# EAGLE board FM Radio Receiver 1.5V (EAGLE 7.2.0)

No outline drawn. Coordinates in mm, seen from the top.
Copper layers (1*16): Top 0.035mm / dielectric 1.5mm / Bottom 0.035mm
Design rules "default": minimum track width 10mil, minimum drill 24mil, track to track 8mil, track to pad 8mil, pad to pad 8mil, via to via 8mil, smd to smd 8mil, copper to edge 40mil, drill to drill 8mil, minimum pad ring 10mil, minimum via ring 8mil, stop-mask expansion 4mil, vias tented up to drill 0mil, thermal gap 10mil

## Footprints (pad centres in the part's own frame; a part is rotated, then mirrored left to right if it is on the bottom)
C050-020X044 = drill 0.9 pad 1.778: 1 -2.54,0; 2 2.54,0
C050-025X060 = drill 0.9 pad 1.778: 1 0,2.54; 2 0,-2.54
E2.5-4/V = drill 0.9 square: + 0,1.27 | drill 0.9 pad 1.778: - 0,-1.27
C050-020X036 = drill 0.9 pad 1.778: 1 -2.54,0; 2 2.54,0
C075-020X044 = drill 0.9 pad 1.778: 1 -2.54,0; 2 5.08,0
TRIM-2222-808 = drill 1.1 octagon: 1 -2.54,2.54; 2 -2.54,-2.54; 3 2.54,-2.54
CTRIMTZ03 = drill 0.9 pad 1.778: 1 0,2.5; 2 0,-2.5
L-03/10 = drill 0.9 pad 1.778: 1 5.08,0; 2 -5.08,0
L-04/8V = drill 0.9 pad 1.778: 1 1.27,-5.08; 2 -1.27,2.54
0204/10-V = drill 0.9 pad 1.778: 1 0,5.08; 2 0,-5.08
0204/7 = drill 0.9 pad 1.778: 1 -2.54,0; 2 5.08,0
POT = drill 0.9 pad 1.778: A -2.54,0; E 2.54,0; S 0,0
TO92-CBE-A = drill 0.9 pad 1.778: 1 0,2.54; 2 2.54,0; 3 0,-2.54

## Placement (x,y rotation side)
C1  [C050-020X044]  76.2,25.4 270 top
C2  [C050-020X044]  88.9,25.4 270 top
C3  10nF  [C050-025X060]  101.6,22.86 0 top
C4  10nF  [C050-020X044]  63.5,25.4 270 top
C5  100μF  [E2.5-4/V]  106.68,27.94 0 top
C6  22pF  [C050-020X036]  10.16,22.86 0 top
C7  100nF  [C075-020X044]  22.86,20.32 90 top
C8  20pF  [TRIM-2222-808]  0,30.48 180 top
C9  5pF  [CTRIMTZ03]  7.62,30.48 180 top
L1  2.2μH  [L-03/10]  55.88,27.94 0 top
L2  [L-04/8V]  15.24,33.02 0 top
R1  4.7kΩ  [0204/10-V]  68.58,33.02 0 top
R2  4.7kΩ  [0204/10-V]  81.28,33.02 0 top
R3  [0204/10-V]  93.98,33.02 0 top
R4  1MΩ  [0204/7]  66.04,25.4 90 top
R5  1MΩ  [0204/7]  78.74,25.4 90 top
R6  56kΩ  [0204/7]  91.44,27.94 270 top
R7  10kΩ  [0204/10-V]  48.26,33.02 0 top
R8  470kΩ  [0204/10-V]  25.4,30.48 0 top
R9  10kΩ  [POT]  25.4,38.1 180 top
T1  [TO92-CBE-A]  68.58,22.86 0 top
T2  [TO92-CBE-A]  81.28,22.86 0 top
T3  [TO92-CBE-A]  93.98,22.86 0 top
T4  [TO92-CBE-A]  30.48,25.4 0 top

## Library data of the parts
C1-C7 = c
C8 C9 = cap-trim
L1 L2 = l
R1-R9 = r
T1-T4 = t

## Nets
N$1: C1.2 R5.1 T2.2
N$2: C2.1 R2.2 R5.2 T2.1
N$3: C1.1 R1.2 R4.2 T1.1
N$4: C2.2 R6.1 T3.2
N$5: C3.1 R3.2 R6.2 T3.1
N$7: C4.2 R4.1 T1.2
N$8: C4.1 L1.1
N$10: C5.+ R1.1 R2.1 R3.1 R7.1 R9.A
N$11: C7.2 R8.2 T4.2
N$12: R8.1 R9.S
N$13: C8.2 C9.2 L2.2 T4.1
N$14: C6.2 C7.1 L1.2 L2.1 R7.2
N$15: C6.1 C8.1 C9.1
N$16: C3.2 C5.- R9.E T1.3 T2.3 T3.3 T4.3

## Tracks (layer width: path | path; a pad name or v marks a point on that pad's centre or on a via)
N$1  (2 unrouted)
N$2  (3 unrouted)
N$3  (3 unrouted)
N$4  (2 unrouted)
N$5  (3 unrouted)
N$7  (2 unrouted)
N$8  (1 unrouted)
N$10  (5 unrouted)
N$11  (2 unrouted)
N$12  (1 unrouted)
N$13  (3 unrouted)
N$14  (4 unrouted)
N$15  (2 unrouted)
N$16  (6 unrouted)